# EAGLE board CFT-PB1-revG-TSSOP (EAGLE 7.6.0), part 1 of 2
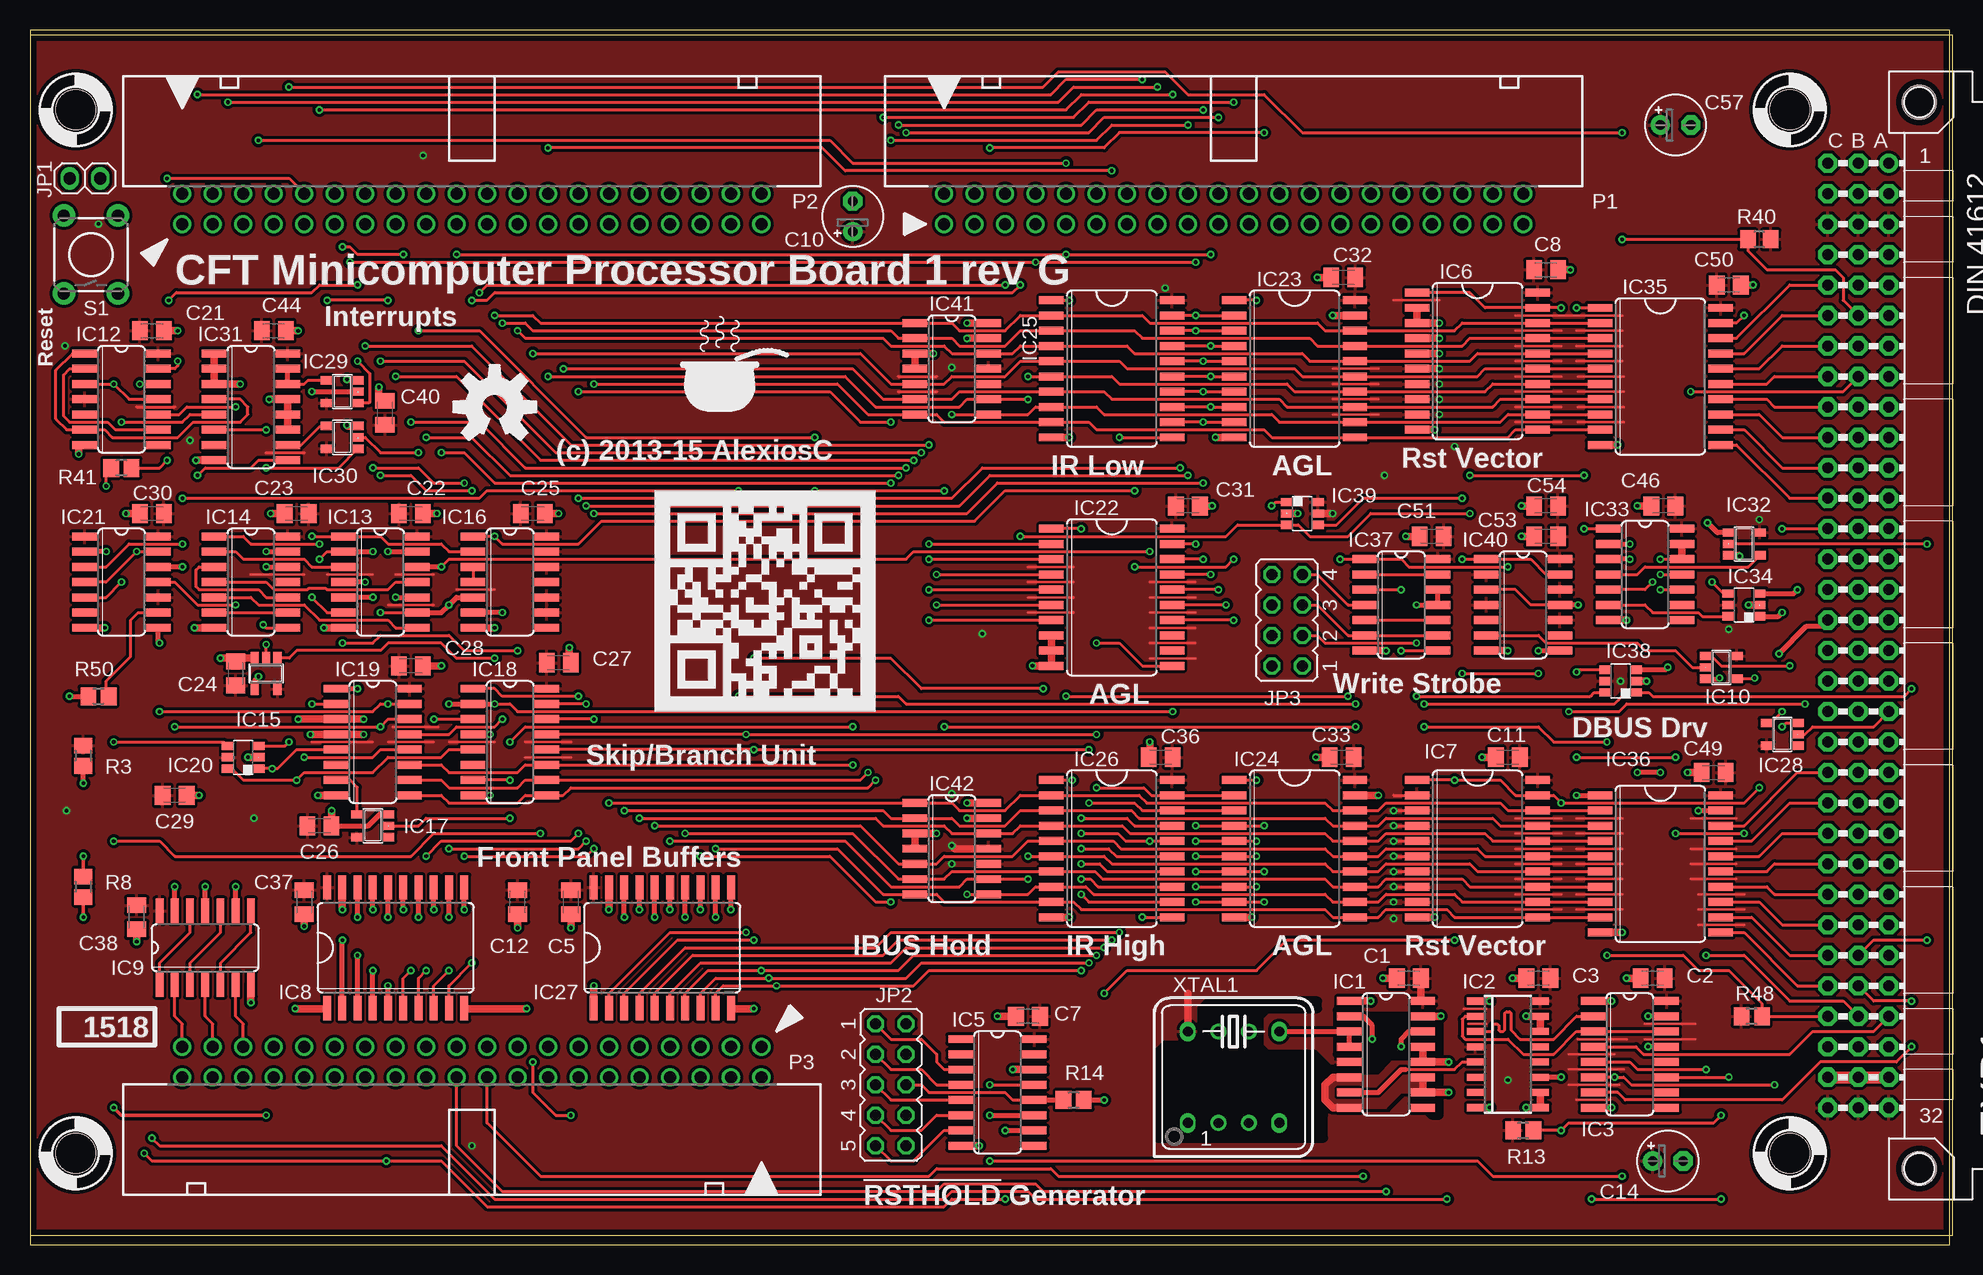
[diagram p0: board, top side]
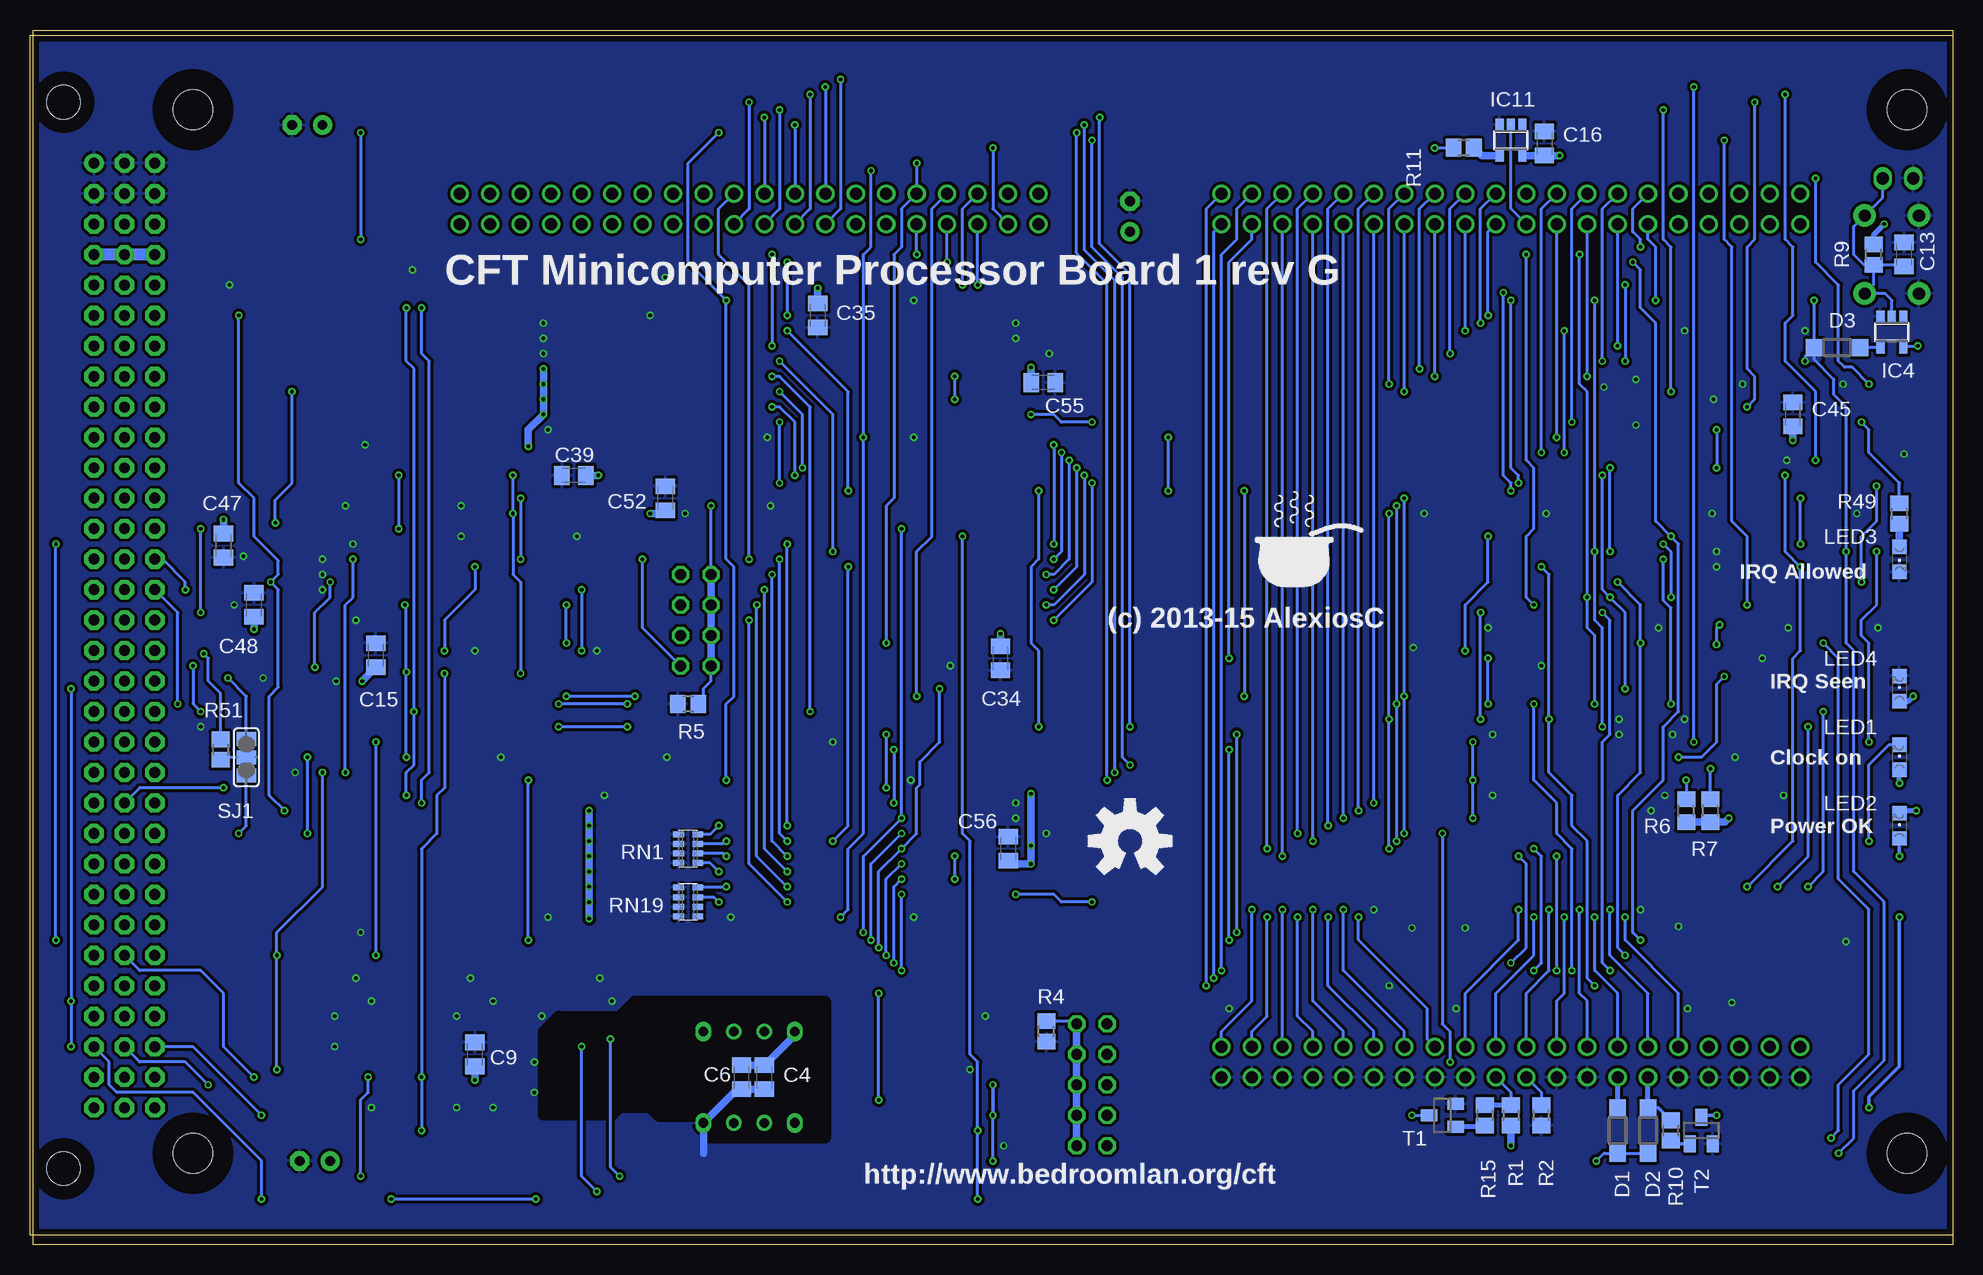
[diagram p1: board, bottom side, seen from below]

Size 160 x 101.27 mm. Coordinates in mm from the lower left corner, seen from the top.
Outline: 0,0 160,0 160,101.27 0,101.27 0,0
Copper layers (1*16): Top 0.035mm / dielectric 1.5mm / Bottom 0.035mm
Design rules "smart-prototyping *": minimum track width 7mil, minimum drill 12mil, track to track 7mil, track to pad 7mil, pad to pad 7mil, via to via 7mil, smd to smd 0mil, copper to edge 20mil, drill to drill 10mil, minimum pad ring 10mil, minimum via ring 6mil, stop-mask expansion 2mil, vias tented up to drill 25mil, thermal gap 10mil
Net classes: 0 default: width 0.254 mm, clearance 0.152 mm; 1 low power: width 0.254 mm, clearance 0.152 mm; 2 Power rails: width 0.61 mm, clearance 0.152 mm
tRestrict: area 94,8.9 to 117.5,20.3
bRestrict: area 94,8.9 to 117.5,20.3

## Footprints (pad centres in the part's own frame; a part is rotated, then mirrored left to right if it is on the bottom)
C0805K = smd 1.3 x 1.6: 1 -1,0; 2 1,0
E2,5-5 = drill 0.813 pad 1.6: + -1.27,0 | drill 0.813 pad 1.6 octagon: - 1.27,0
SOD123 = smd 1.4 x 1.4: A 1.9,0; C -1.9,0
VG96K = drill 0.914 pad 1.6: A1 154.94,39.37 | drill 0.914 pad 1.6 octagon: A2 154.94,36.83; A3 154.94,34.29; A4 154.94,31.75; A5 154.94,29.21; A6 154.94,26.67; A7 154.94,24.13; A8 154.94,21.59; A9 154.94,19.05; A10 154.94,16.51; A11 154.94,13.97; A12 154.94,11.43; A13 154.94,8.89; A14 154.94,6.35; A15 154.94,3.81; A16 154.94,1.27; A17 154.94,-1.27; A18 154.94,-3.81; A19 154.94,-6.35; A20 154.94,-8.89; A21 154.94,-11.43; A22 154.94,-13.97; A23 154.94,-16.51; A24 154.94,-19.05; A25 154.94,-21.59; A26 154.94,-24.13; A27 154.94,-26.67; A28 154.94,-29.21; A29 154.94,-31.75; A30 154.94,-34.29; A31 154.94,-36.83; A32 154.94,-39.37; B1 152.4,39.37; B2 152.4,36.83; B3 152.4,34.29; B4 152.4,31.75; B5 152.4,29.21; B6 152.4,26.67; B7 152.4,24.13; B8 152.4,21.59; B9 152.4,19.05; B10 152.4,16.51; B11 152.4,13.97; B12 152.4,11.43; B13 152.4,8.89; B14 152.4,6.35; B15 152.4,3.81; B16 152.4,1.27; B17 152.4,-1.27; B18 152.4,-3.81; B19 152.4,-6.35; B20 152.4,-8.89; B21 152.4,-11.43; B22 152.4,-13.97; B23 152.4,-16.51; B24 152.4,-19.05; B25 152.4,-21.59; B26 152.4,-24.13; B27 152.4,-26.67; B28 152.4,-29.21; B29 152.4,-31.75; B30 152.4,-34.29; B31 152.4,-36.83; B32 152.4,-39.37; C1 149.86,39.37; C2 149.86,36.83; C3 149.86,34.29; C4 149.86,31.75; C5 149.86,29.21; C6 149.86,26.67; C7 149.86,24.13; C8 149.86,21.59; C9 149.86,19.05; C10 149.86,16.51; C11 149.86,13.97; C12 149.86,11.43; C13 149.86,8.89; C14 149.86,6.35; C15 149.86,3.81; C16 149.86,1.27; C17 149.86,-1.27; C18 149.86,-3.81; C19 149.86,-6.35; C20 149.86,-8.89; C21 149.86,-11.43; C22 149.86,-13.97; C23 149.86,-16.51; C24 149.86,-19.05; C25 149.86,-21.59; C26 149.86,-24.13; C27 149.86,-26.67; C28 149.86,-29.21; C29 149.86,-31.75; C30 149.86,-34.29; C31 149.86,-36.83; C32 149.86,-39.37 | hole 2.794: 157.48,44.45; 157.48,-44.45
SO16 = smd 0.66 x 2.032: 1 -4.445,-3.073; 2 -3.175,-3.073; 3 -1.905,-3.073; 4 -0.635,-3.073; 5 0.635,-3.073; 6 1.905,-3.073; 7 3.175,-3.073; 8 4.445,-3.073; 9 4.445,3.073; 10 3.175,3.073; 11 1.905,3.073; 12 0.635,3.073; 13 -0.635,3.073; 14 -1.905,3.073; 15 -3.175,3.073; 16 -4.445,3.073
SO16D = smd 0.6 x 1.4: 1 -4.445,-2.715; 2 -3.175,-2.715; 3 -1.905,-2.715; 4 -0.635,-2.715; 5 0.635,-2.715; 6 1.905,-2.715; 7 3.175,-2.715; 8 4.445,-2.715; 9 4.445,2.715; 10 3.175,2.715; 11 1.905,2.715; 12 0.635,2.715; 13 -0.635,2.715; 14 -1.905,2.715; 15 -3.175,2.715; 16 -4.445,2.715
SOT23-5 = smd 0.69 x 0.99: 1 -0.95,-1.29; 2 0,-1.29; 3 0.95,-1.29; 4 0.95,1.3; 5 -0.95,1.3
SO20W = smd 0.66 x 2.032: 1 -5.715,-5.029; 2 -4.445,-5.029; 3 -3.175,-5.029; 4 -1.905,-5.029; 5 -0.635,-5.029; 6 0.635,-5.029; 7 1.905,-5.029; 8 3.175,-5.029; 9 4.445,-5.029; 10 5.715,-5.029; 11 5.715,5.029; 12 4.445,5.029; 13 3.175,5.029; 14 1.905,5.029; 15 0.635,5.029; 16 -0.635,5.029; 17 -1.905,5.029; 18 -3.175,5.029; 19 -4.445,5.029; 20 -5.715,5.029
SO14 = smd 0.66 x 2.032: 1 -3.81,-3.073; 2 -2.54,-3.073; 3 -1.27,-3.073; 4 0,-3.073; 5 1.27,-3.073; 6 2.54,-3.073; 7 3.81,-3.073; 8 3.81,3.073; 9 2.54,3.073; 10 1.27,3.073; 11 0,3.073; 12 -1.27,3.073; 13 -2.54,3.073; 14 -3.81,3.073
DBV_R-PDSO-G6 = smd 0.69 x 0.99: 1 -0.95,-1.29; 2 0,-1.29; 3 0.95,-1.29; 4 0.95,1.3; 5 0,1.3; 6 -0.95,1.3
1X02 = drill 1.016 long: 1 -1.27,0; 2 1.27,0
JP5Q = drill 0.914 octagon: 1 -5.08,-1.27; 2 -5.08,1.27; 3 -2.54,-1.27; 4 -2.54,1.27; 5 0,-1.27; 6 0,1.27; 7 2.54,-1.27; 8 2.54,1.27; 9 5.08,-1.27; 10 5.08,1.27
JP4Q = drill 0.914 octagon: 1 -3.81,-1.27; 2 -3.81,1.27; 3 -1.27,-1.27; 4 -1.27,1.27; 5 1.27,-1.27; 6 1.27,1.27; 7 3.81,-1.27; 8 3.81,1.27
CHIPLED_0805 = smd 1.2 x 1.2: A 0,-1.05; C 0,1.05
PAK100/2500-5-40 = drill 1 pad 1.422: 1 -24.13,-1.27; 2 -24.13,1.27; 3 -21.59,-1.27; 4 -21.59,1.27; 5 -19.05,-1.27; 6 -19.05,1.27; 7 -16.51,-1.27; 8 -16.51,1.27; 9 -13.97,-1.27; 10 -13.97,1.27; 11 -11.43,-1.27; 12 -11.43,1.27; 13 -8.89,-1.27; 14 -8.89,1.27; 15 -6.35,-1.27; 16 -6.35,1.27; 17 -3.81,-1.27; 18 -3.81,1.27; 19 -1.27,-1.27; 20 -1.27,1.27; 21 1.27,-1.27; 22 1.27,1.27; 23 3.81,-1.27; 24 3.81,1.27; 25 6.35,-1.27; 26 6.35,1.27; 27 8.89,-1.27; 28 8.89,1.27; 29 11.43,-1.27; 30 11.43,1.27; 31 13.97,-1.27; 32 13.97,1.27; 33 16.51,-1.27; 34 16.51,1.27; 35 19.05,-1.27; 36 19.05,1.27; 37 21.59,-1.27; 38 21.59,1.27; 39 24.13,-1.27; 40 24.13,1.27
R0805 = smd 1.3 x 1.5: 1 -0.85,0; 2 0.85,0
R0805' = smd 1.3 x 1.5: 1 -0.95,0; 2 0.95,0
CTS742C083 = smd 0.5 x 0.9: 1 -1.2,-0.8; 2 -0.4,-0.8; 3 0.4,-0.8; 4 1.2,-0.8; 5 1.2,0.8; 6 0.4,0.8; 7 -0.4,0.8; 8 -1.2,0.8
TACTILE-PTH = drill 1.016 pad 1.88: 1 -3.251,2.261; 2 3.251,2.261; 3 -3.251,-2.261; 4 3.251,-2.261
SJ_2 = smd 1.168 x 1.6: 1 -1.524,0; 2 0,0; 3 1.524,0
SOT23 = smd 1 x 1.4: 1 -0.95,-1.1; 2 0.95,-1.1; 3 0,1.1
STANDOFF_28_60 = hole 3.302: 0,0
DIL08S-SOCKET = drill 0.813 long: 1 -3.81,-3.81; 4 3.81,-3.81; 5 3.81,3.81; 8 -3.81,3.81 | drill 0.8: 2 -1.27,-3.81; 3 1.27,-3.81; 6 1.27,3.81; 7 -1.27,3.81

## Placement (x,y rotation side)
$4_37_$  SIGNATURESILK  [SIGNATURE]  54.61,69.21 0 top
$4_37_$1  SIGNATURESILK  [SIGNATURE]  57.78,54.61 0 bottom
$4_39_$  OSHW-LOGOL  [OSHW-LOGO-L]  38.73,69.85 0 top
$4_39_$1  OSHW-LOGOL  [OSHW-LOGO-L]  68.58,33.66 0 bottom
$4_40_$  QRCODE-CFT  [CFT-QRCODE]  52.07,44.45 0 top
C1  0.1uF  [C0805K]  114.94,22.22 0 top
C2  0.1uF  [C0805K]  135.25,22.22 0 top
C3  0.1uF  [C0805K]  125.73,22.22 0 top
C4  1uF  [C0805K]  100.97,13.97 90 bottom
C5  0.1uF  [C0805K]  45.09,28.57 90 top
C6  0.1uF  [C0805K]  99.06,13.97 90 bottom
C7  0.1uF  [C0805K]  83.19,19.05 0 top
C8  0.1uF  [C0805K]  126.36,81.28 180 top
C9  1uF  [C0805K]  123.19,15.88 270 bottom
C10  1uF  [E2,5-5]  68.58,85.72 90 top
C11  0.1uF  [C0805K]  123.19,40.64 0 top
C12  1uF  [C0805K]  40.64,28.57 90 top
C13  0.1uF  [C0805K]  4.06,82.55 270 bottom
C14  47uF  [E2,5-5]  136.53,6.98 0 top
C15  0.1uF  [C0805K]  131.44,49.15 270 bottom
C16  0.1uF  [C0805K]  34.04,91.82 270 bottom
C21  0.1uF  [C0805K]  10.16,76.2 180 top
C22  0.1uF  [C0805K]  31.75,60.96 180 top
C23  0.1uF  [C0805K]  22.23,60.96 0 top
C24  0.1uF  [C0805K]  17.14,47.62 270 top
C25  0.1uF  [C0805K]  41.91,60.96 180 top
C26  0.1uF  [C0805K]  24.13,34.93 180 top
C27  0.1uF  [C0805K]  44.07,48.51 180 top
C28  0.1uF  [C0805K]  31.75,48.26 180 top
C29  0.1uF  [C0805K]  12.06,37.47 180 top
C30  1uF  [C0805K]  10.16,60.96 0 top
C31  0.1uF  [C0805K]  96.52,61.6 180 top
C32  0.1uF  [C0805K]  109.47,80.64 0 top
C33  0.1uF  [C0805K]  109.35,40.64 0 top
C34  1uF  [C0805K]  79.38,48.9 90 bottom
C35  0.1uF  [C0805K]  94.61,77.47 90 bottom
C36  0.1uF  [C0805K]  94.23,40.64 0 top
C37  0.1uF  [C0805K]  22.86,28.57 90 top
C38  0.1uF  [C0805K]  8.89,27.3 90 top
C39  1uF  [C0805K]  114.94,64.14 0 bottom
C40  0.1uF  [C0805K]  29.59,69.34 270 top
C44  0.1uF  [C0805K]  20.32,76.2 180 top
C45  1uF  [C0805K]  13.34,69.21 270 bottom
C46  0.1uF  [C0805K]  136.14,61.6 0 top
C47  0.1uF  [C0805K]  144.15,58.29 90 bottom
C48  0.1uF  [C0805K]  141.6,53.34 270 bottom
C49  0.1uF  [C0805K]  140.34,39.37 0 top
C50  0.1uF  [C0805K]  141.6,80.01 180 top
C51  0.1uF  [C0805K]  116.84,59.05 0 top
C52  0.1uF  [C0805K]  107.31,62.23 270 bottom
C53  0.1uF  [C0805K]  126.36,59.05 0 top
C54  1uF  [C0805K]  126.36,61.6 0 top
C55  0.1uF  [C0805K]  75.82,71.88 180 bottom
C56  0.1uF  [C0805K]  78.74,33.02 270 bottom
C57  47uF  [E2,5-5]  137.16,93.34 0 top
D1  [SOD123]  27.94,9.53 270 bottom
D2  [SOD123]  25.4,9.53 270 bottom
D3  [SOD123]  9.65,74.8 180 bottom
EXP1  [VG96K]  0,50.8 0 top
IC1  74HC253D  [SO16]  113.03,15.88 270 top
IC2  74HC193D  [SO16D]  123.19,15.88 270 top
IC3  74HC139D  [SO16]  133.35,15.88 270 top
IC4  74AUC1G17DBV  [SOT23-5]  5.08,76.07 180 bottom
IC5  74HC590D  [SO16]  80.64,12.7 270 top
IC6  74HC541DW  [SO20W]  120.65,73.66 270 top
IC7  74HC541DW  [SO20W]  120.65,33.02 270 top
IC8  74HC541DW  [SO20W]  30.48,24.77 0 top
IC9  74AC04D  [SO14]  14.61,24.77 0 top
IC10  74LVC1G125DBV  [SOT23-5]  140.97,48.13 270 top
IC11  74AHC1G04DBV  [SOT23-5]  36.83,92.08 180 bottom
IC12  74HC74D  [SO14]  7.62,70.48 270 top
IC13  74HC08D  [SO14]  29.21,55.25 270 top
IC14  74HC32D  [SO14]  18.41,55.25 270 top
IC15  74AHC1G86DBV  [SOT23-5]  19.68,47.62 180 top
IC16  74HC32D  [SO14]  40.01,55.25 270 top
IC17  74AHC1G04DBV  [SOT23-5]  28.57,34.93 90 top
IC18  74HC251D  [SO16]  40.01,41.91 270 top
IC19  74HC251D  [SO16]  28.57,41.91 270 top
IC20  74AC1G11DBV  [DBV_R-PDSO-G6]  17.78,40.64 90 top
IC21  74HC74D  [SO14]  7.62,55.25 270 top
IC22  74HC574D  [SO20W]  90.17,53.98 270 top
IC23  74HC541DW  [SO20W]  105.41,73.02 270 top
IC24  74HC541DW  [SO20W]  105.41,33.02 270 top
IC25  74HC573D  [SO20W]  90.17,73.02 270 top
IC26  74HC573D  [SO20W]  90.17,33.02 270 top
IC27  74HC541DW  [SO20W]  52.7,24.77 0 top
IC28  74AHC1G04DBV  [SOT23-5]  146.05,42.55 90 top
IC29  74AHC1G08DBV  [SOT23-5]  26.04,71.12 90 top
IC30  74AHC1G32DBV  [SOT23-5]  26.04,67.31 90 top
IC31  74HC112D  [SO16]  18.41,69.85 270 top
IC32  74AHC1G32DBV  [SOT23-5]  142.88,58.42 270 top
IC33  74HC74D  [SO14]  134.62,55.88 270 top
IC34  74AC1G11DBV  [DBV_R-PDSO-G6]  142.88,53.34 90 top
IC35  74HC245DW  [SO20W]  135.89,72.39 270 top
IC36  74HC245DW  [SO20W]  135.89,31.75 270 top
IC37  74AC04D  [SO14]  114.3,53.34 270 top
IC38  74AC1G27DBV  [DBV_R-PDSO-G6]  132.59,46.99 90 top
IC39  74AC1G11DBV  [DBV_R-PDSO-G6]  106.05,60.96 270 top
IC40  74HC74D  [SO14]  124.46,53.34 270 top
IC41  SN74ACT1071D  [SO14]  76.83,73.02 270 top
IC42  SN74ACT1071D  [SO14]  76.83,33.02 270 top
JP1  [1X02]  4.57,88.9 0 top
JP2  [JP5Q]  71.75,13.33 270 top
JP3  [JP4Q]  104.78,52.07 90 top
LED1  LED-5MM-GREEN  [CHIPLED_0805]  4.45,40.64 0 bottom
LED2  LED-5MM-GREEN  [CHIPLED_0805]  4.45,34.93 0 bottom
LED3  LED-5MM-GREEN  [CHIPLED_0805]  4.45,57.15 180 bottom
LED4  LED-5MM-GREEN  [CHIPLED_0805]  4.45,46.36 0 bottom
P1  2540-5  [PAK100/2500-5-40]  100.33,86.36 0 top
P2  2540-5  [PAK100/2500-5-40]  36.83,86.36 0 top
P3  2540-5  [PAK100/2500-5-40]  36.83,15.24 180 top
R1  4k7  [R0805]  36.83,10.79 270 bottom
R2  4k7  [R0805]  34.29,10.79 90 bottom
R3  330R  [R0805]  4.45,40.77 270 top
R4  4k7  [R0805]  75.56,17.78 90 bottom
R5  4k7  [R0805]  105.41,45.09 180 bottom
R6  4k7  [R0805']  22.23,36.2 90 bottom
R7  4k7  [R0805']  20.19,36.2 90 bottom
R8  330R  [R0805]  4.45,29.84 270 top
R9  50k  [R0805]  6.6,82.55 90 bottom
R10  4k7  [R0805]  23.5,9.53 90 bottom
R11  30R  [R0805]  40.77,91.44 180 bottom
R13  4k7  [R0805]  124.46,9.53 180 top
R14  30R  [R0805]  87,12.06 180 top
R15  4k7  [R0805]  38.99,10.79 90 bottom
R40  4k7  [R0805']  144.15,83.82 180 top
R41  30R  [R0805]  7.62,64.77 180 top
R48  4k7  [R0805]  143.51,19.05 180 top
R49  330R  [R0805]  4.45,60.96 90 bottom
R50  330R  [R0805]  5.71,45.72 0 top
R51  30R  [R0805]  144.4,41.28 270 bottom
RN1  4k7  [CTS742C083]  105.41,33.02 270 bottom
RN19  4k7  [CTS742C083]  105.41,28.57 270 bottom
S1  [TACTILE-PTH]  5.08,82.55 90 top
SJ1  [SJ_2]  142.24,40.64 90 bottom
T1  BC848  [SOT23]  42.55,10.79 90 bottom
T2  BC848  [SOT23]  20.95,9.53 0 bottom
U1  HOLE  [STANDOFF_28_60]  3.81,94.61 0 top
U2  HOLE  [STANDOFF_28_60]  3.81,7.62 0 top
U3  HOLE  [STANDOFF_28_60]  146.69,94.61 0 top
U4  HOLE  [STANDOFF_28_60]  146.69,7.62 0 top
XTAL1  16.000MHz  [DIL08S-SOCKET]  100.33,13.97 0 top

## Library data of the parts
$4_37_$ $4_37_$1 $4_40_$ D1-D3 IC1-IC9 IC11-IC42 LED1-LED4 U1-U4 XTAL1 = alexios
$4_39_$ $4_39_$1 S1 = SparkFun
C1-C16 C21-C40 C44-C57 R6 R7 R40 = rcl
EXP1 = alexios-19inch
IC10 = 74xx-little-us
JP1 = pinhead
JP2 JP3 SJ1 = jumper
P1-P3 = con-3m; OC_FARNELL: 9838414; OC_NEWARK: unknown
R1-R5 R8-R11 R13-R15 R41 R48-R51 = resistor
RN1 RN19 = resistor-net; OC_FARNELL: unknown; OC_NEWARK: unknown
T1 T2 = transistor

## Nets
![R1]: EXP1.B9
![R6]: EXP1.B10
![R7]: EXP1.B11
![W1]: EXP1.B12
!ACCPL: P1.39
!AINDEX: P2.20
!BUSEN: IC34.4 IC35.19 IC36.19
!CLI: IC29.2 P1.17
!CLL: P1.1
!CPL: P1.2
!DEC: P1.40
!END: IC21.11 IC22.11 P1.10
!ENDEXT: EXP1.B7
!FINT: IC30.1 IC31.6
!FPRESET: D1.C P3.28
!HALT: EXP1.A19 IC28.2
!INCPC: P2.3
!IO: EXP1.C14 IC34.3
!IODEV1XX: EXP1.B24
!IODEV2XX: EXP1.B25
!IODEV3XX: EXP1.B26
!IRQ: EXP1.C29 IC30.2 R48.1
!IRQ0: EXP1.C18
!IRQ1: EXP1.C19
!IRQ2: EXP1.C20
!IRQ3: EXP1.A13
!IRQ4: EXP1.A14
!IRQ5: EXP1.A15
!IRQ6: EXP1.A16
!IRQ7: EXP1.A18
!IRQS: EXP1.A30 IC21.8
!MASKEDIRQ: IC30.4 IC31.10
!MEM: EXP1.C13 IC34.1
!OPIF3: IC17.4 IC19.7
!R: EXP1.C15 IC35.1 IC36.1
!RAC: P2.4
!RAGL: IC23.1 IC24.1 P1.3
!RDR: P2.5
!RESET: D1.A D2.A D3.A EXP1.C30 IC2.11 IC5.10 IC12.13 IC21.4 IC21.13 IC29.1 IC33.1 IC39.3 R13.1
!RESET_OR_CLI: IC29.4 IC31.14 IC31.15
!RPC: P2.6
!RSTHOLD: EXP1.B22 IC6.1 IC6.19 IC7.1 IC7.19 R14.1
!RSTHOLD-SHORT: IC5.12 JP2.2 JP2.4 JP2.6 JP2.8 JP2.10 R4.2 R14.2
!SKIP: P1.15 R41.1
!SKIP0: IC20.4 IC21.2
!SKIPEXT: EXP1.B6 IC20.3 R40.2
!STI: IC12.10 P1.16
!STI-DELAY: IC12.1 IC12.6 IC31.4
!STPAC: P2.1
!STPDR: P2.2
!SYSDEV: EXP1.A28
!T34: EXP1.B27 IC3.11 IC32.2
!W: EXP1.C16 R51.1
!WAC: P2.7
!WAITING: IC33.6 IC34.6
!WALU: P1.4
!WAR: P2.8
!WCLR: IC37.1 IC40.8 JP3.1
!WDR: P2.9
!WEN: IC38.6 P1.8
!WIR: IC11.2 P2.19
!WPC: IC12.3 IC12.11 P2.10
!WS: EXP1.B8 IC32.1
*TPA: EXP1.A17
*TPC: EXP1.C17
+3.3V: EXP1.A4 EXP1.B4 EXP1.C4
+12V [Power rails]: EXP1.A31 EXP1.B31 EXP1.C31
AB0: EXP1.A5
AB1: EXP1.A6
AB2: EXP1.A7
AB3: EXP1.A8
AB4: EXP1.A9
AB5: EXP1.A10
AB6: EXP1.A11
AB7: EXP1.A12
AB8: EXP1.A20
AB9: EXP1.A21
AB10: EXP1.A22
AB11: EXP1.A23
AB12: EXP1.A24
AB13: EXP1.A25
AB14: EXP1.A26
AB15: EXP1.A27
AC0: P1.23
AC1: P1.24
AC2: P1.25
AC3: P1.26
AC4: P1.27
AC5: P1.28
AC6: P1.29
AC7: P1.30
AC8: P1.31
AC9: P1.32
AC10: P1.33
AC11: P1.34
AC12: P1.35
AC13: P1.36
AC14: P1.37
AC15: P1.38
AEXT0: EXP1.B13
AEXT1: EXP1.B14
AEXT2: EXP1.B15
AEXT3: EXP1.B16
AEXT4: EXP1.B17
AEXT5: EXP1.B18
AEXT6: EXP1.B19
AEXT7: EXP1.B20
BFIRQ: IC9.6 P3.35
BFNEG: IC9.4 P3.37
BFZERO: IC9.2 P3.39
CLK1: EXP1.A29 IC3.4
CLK2: EXP1.B29 IC3.5 IC33.3
CLK3: EXP1.B30 IC3.6 IC5.11 IC5.13
CLK4: EXP1.B28 IC3.7 IC21.3 IC38.1
CLKIN: IC1.7 IC2.5
DB0: EXP1.C5 IC35.18
DB1: EXP1.C6 IC35.17
DB2: EXP1.C7 IC35.16
DB3: EXP1.C8 IC35.15
DB4: EXP1.C9 IC35.14
DB5: EXP1.C10 IC35.13
DB6: EXP1.C11 IC35.12
DB7: EXP1.C12 IC35.11
DB8: EXP1.C21 IC36.18
DB9: EXP1.C22 IC36.17
DB10: EXP1.C23 IC36.16
DB11: EXP1.C24 IC36.15
DB12: EXP1.C25 IC36.14
DB13: EXP1.C26 IC36.13
DB14: EXP1.C27 IC36.12
DB15: EXP1.C28 IC36.11
FASTCLK: IC1.3 IC1.4 XTAL1.5
FINT: IC31.5 R49.2
FIRQ: IC9.9 IC21.12 IC31.9
FL: IC13.5 IC19.1 P1.5
FNEG: IC9.11 IC13.13 IC19.14 P2.11
FPCLKEN: IC1.2 P3.20 R1.1 R15.2
FPIR0: IC8.18 P3.31
FPIR1: IC8.17 P3.29
FPIR2: IC8.16 P3.27
FPIR3: IC8.15 P3.25
FPIR4: IC8.14 P3.23
FPIR5: IC8.13 P3.21
FPIR6: IC8.12 P3.19
FPIR7: IC8.11 P3.17
FPIR8: IC27.18 P3.15
FPIR9: IC27.17 P3.13
FPIR10: IC27.16 P3.11
FPIR11: IC27.15 P3.9
FPIR12: IC27.14 P3.7
FPIR13: IC27.13 P3.5
FPIR14: IC27.12 P3.3
FPIR15: IC27.11 P3.1
FPUSTEP: IC1.14 P3.22 R2.2
FV: IC13.2 IC19.2 P1.6
FZERO: IC9.13 IC13.10 IC19.15 P2.12
GND [Power rails]: C1.1 C2.1 C3.1 C4.1 C5.1 C6.1 C7.1 C8.1 C9.1 C10.- C11.1 C12.1 C13.1 C14.- C15.1 C16.1 C21.1 C22.1 C23.1 C24.1 C25.1 C26.1 C27.1 C28.1 C29.1 C30.1 C31.1 C32.1 C33.1 C34.1 C35.1 C36.1 C37.1 C38.1 C39.1 C40.1 C44.1 C45.1 C46.1 C47.1 C48.1 C49.1 C50.1 C51.1 C52.1 C53.1 C54.1 C55.1 C56.1 C57.- EXP1.A1 EXP1.A2 EXP1.B1 EXP1.B2 EXP1.C1 EXP1.C2 IC1.1 IC1.6 IC1.8 IC1.10 IC1.11 IC1.12 IC1.13 IC1.15 IC2.1 IC2.8 IC2.9 IC2.10 IC2.14 IC2.15 IC3.1 IC3.8 IC3.13 IC3.15 IC4.3 IC5.8 IC5.14 IC6.2 IC6.3 IC6.4 IC6.5 IC6.10 IC7.10 IC8.1 IC8.10 IC8.19 IC9.7 IC10.3 IC11.3 IC12.7 IC12.12 IC13.7 IC14.7 IC14.12 IC14.13 IC15.3 IC16.7 IC17.3 IC18.4 IC18.8 IC19.3 IC19.4 IC19.8 IC20.2 IC21.7 IC22.8 IC22.9 IC22.10 IC23.10 IC23.19 IC24.10 IC24.19 IC25.1 IC25.10 IC26.1 IC26.10 IC27.1 IC27.10 IC27.19 IC28.3 IC29.3 IC30.3 IC31.1 IC31.2 IC31.3 IC31.8 IC31.11 IC31.12 IC31.13 IC32.3 IC33.2 IC33.7 IC33.10 IC33.11 IC33.12 IC33.13 IC34.2 IC35.10 IC36.10 IC37.7 IC38.2 IC39.2 IC40.7 IC41.3 IC41.4 IC41.13 IC41.14 IC42.3 IC42.4 IC42.13 IC42.14 JP1.1 LED3.C LED4.C P3.2 P3.4 P3.6 P3.8 P3.10 P3.12 P3.14 P3.16 P3.18 P3.24 P3.26 P3.32 P3.34 P3.36 P3.38 P3.40 R2.1 R4.1 R5.2 RN1.1 RN1.2 RN1.3 RN1.4 RN19.1 RN19.2 RN19.3 RN19.4 S1.1 S1.2 T1.2 T2.2 XTAL1.4
HALT: IC10.1 IC28.4
IBUS0: IC6.18 IC23.18 IC25.2 IC35.2 IC41.1 P2.21
IBUS1: IC6.17 IC23.17 IC25.3 IC35.3 IC41.2 P2.22
IBUS2: IC6.16 IC23.16 IC25.4 IC35.4 IC41.12 P2.23
IBUS3: IC6.15 IC23.15 IC25.5 IC35.5 IC41.5 P2.24
IBUS4: IC6.14 IC23.14 IC25.6 IC35.6 IC41.9 P2.25
IBUS5: IC6.13 IC23.13 IC25.7 IC35.7 IC41.6 P2.26
IBUS6: IC6.12 IC23.12 IC25.8 IC35.8 IC41.8 P2.27
IBUS7: IC6.11 IC23.11 IC25.9 IC35.9 IC41.7 P2.28
IBUS8: IC7.18 IC24.18 IC26.2 IC36.2 IC42.1 P2.29
IBUS9: IC7.17 IC24.17 IC26.3 IC36.3 IC42.2 P2.30
IBUS10: IC7.16 IC24.16 IC26.4 IC36.4 IC42.12 P2.31
IBUS11: IC7.15 IC24.15 IC26.5 IC36.5 IC42.5 P2.32
IBUS12: IC7.14 IC24.14 IC26.6 IC36.6 IC42.9 P2.33
IBUS13: IC7.13 IC24.13 IC26.7 IC36.7 IC42.6 P2.34
IBUS14: IC7.12 IC24.12 IC26.8 IC36.8 IC42.8 P2.35
IBUS15: IC7.11 IC24.11 IC26.9 IC36.9 IC42.7 P2.36
IR0: IC8.2 IC13.1 IC16.2 IC23.2 IC25.19 P1.7
IR1: IC8.3 IC13.4 IC16.1 IC23.3 IC25.18
IR2: IC8.4 IC13.9 IC16.5 IC23.4 IC25.17 P1.9
IR3: IC8.5 IC13.12 IC18.3 IC23.5 IC25.16
IR4: IC8.6 IC15.1 IC18.2 IC23.6 IC25.15
IR5: IC8.7 IC18.1 IC23.7 IC25.14
IR6: IC8.8 IC18.15 IC23.8 IC25.13
IR7: IC8.9 IC18.14 IC23.9 IC25.12
IR8: IC18.13 IC24.2 IC26.19 IC27.2
IR9: IC18.12 IC24.3 IC26.18 IC27.3
IR10: IC22.1 IC26.17 IC27.4
IR11: IC26.16 IC27.5 P1.22
IR12: IC26.15 IC27.6 P2.37
IR13: IC26.14 IC27.7 P2.38
IR14: IC26.13 IC27.8 P2.39
IR15: IC26.12 IC27.9 P2.40
LATCH-IR: IC25.11 IC26.11 R11.2
N$1: IC38.4 IC40.3 IC40.11 SJ1.1
N$2: D3.C IC4.4
N$3: IC9.1 IC9.12
N$4: IC9.3 IC9.10
N$6: IC9.5 IC9.8
N$7: R51.2 SJ1.2
N$8: R15.1 T1.1
N$9: LED1.C T1.3
N$10: LED1.A R3.2
N$13: IC11.4 R11.1
N$14: IC10.2 IC40.6
N$15: IC37.11 IC37.12 JP3.3
N$16: IC37.2 IC37.13
N$17: IC37.5 IC37.10
N$18: IC37.6 IC37.9 JP3.5
N$19: IC32.4 IC33.4
N$20: IC37.3 IC37.8
N$21: IC37.4 JP3.7
N$22: IC10.4 SJ1.3
N$23: IC16.3 IC16.4
N$24: IC39.1 JP3.2 JP3.4 JP3.6 JP3.8 R5.1
N$25: IC39.4 IC40.1 IC40.13
N$26: R10.1 T2.1
N$27: R8.2 T2.3
N$28: IC12.2 IC12.9
N$33: C13.2 IC4.2 JP1.2 R9.1 S1.3 S1.4
N$35: IC21.5 R41.2
N$36: IC5.7 JP2.9
N$154: IC5.6 JP2.7
N$375: IC5.5 JP2.5
N$376: IC5.4 JP2.3
N$377: IC5.3 JP2.1
N$732: LED4.A R50.1
N$733: LED3.A R49.1
N$739: IC21.9 R50.2
OP1_ROLL: IC16.6 IC19.13
OP2_BRANCH: IC15.4 IC19.12
OPIF0: IC18.11 IC19.11 P1.18
OPIF1: IC18.10 IC19.10 P1.19
OPIF2: IC18.9 IC19.9 P1.20
OPIF3: IC17.2 IC18.7 P1.21
PAGE0: IC22.19 IC24.4 RN1.8
PAGE1: IC22.18 IC24.5 RN1.7
PAGE2: IC22.17 IC24.6 RN1.6
PAGE3: IC22.16 IC24.7 RN1.5
PAGE4: IC22.15 IC24.8 RN19.8
PAGE5: IC22.14 IC24.9 RN19.7
PC10: IC22.2 P2.13
PC11: IC22.3 P2.14
PC12: IC22.4 P2.15
PC13: IC22.5 P2.16
PC14: IC22.6 P2.17
PC15: IC22.7 P2.18
POWERLED: LED2.A R8.1
POWEROK: D2.C P3.30 R10.2
RUNIT0: P1.11
RUNIT1: P1.12
RUNIT2: P1.13
RUNIT3: P1.14
SKIPMUXHI: IC19.5 IC20.1 R7.2
SKIPMUXLO: IC18.5 IC20.6 R6.2
SL: IC13.6 IC14.1
SN: IC13.11 IC14.4
SV: IC13.3 IC14.2
SVL: IC14.3 IC14.10
SVLZN: IC14.8 IC15.2
SZ: IC13.8 IC14.5
SZN: IC14.6 IC14.9
VCC [Power rails]: C1.2 C2.2 C3.2 C4.2 C5.2 C6.2 C7.2 C8.2 C9.2 C10.+ C11.2 C12.2 C14.+ C15.2 C16.2 C21.2 C22.2 C23.2 C24.2 C25.2 C26.2 C27.2 C28.2 C29.2 C30.2 C31.2 C32.2 C33.2 C34.2 C35.2 C36.2 C37.2 C38.2 C39.2 C40.2 C44.2 C45.2 C46.2 C47.2 C48.2 C49.2 C50.2 C51.2 C52.2 C53.2 C54.2 C55.2 C56.2 C57.+ EXP1.A3 EXP1.A32 EXP1.B3 EXP1.B32 EXP1.C3 EXP1.C32 IC1.5 IC1.16 IC2.4 IC2.16 IC3.16 IC4.5 IC5.16 IC6.6 IC6.7 IC6.8 IC6.9 IC6.20 IC7.2 IC7.3 IC7.4 IC7.5 IC7.6 IC7.7 IC7.8 IC7.9 IC7.20 IC8.20 IC9.14 IC10.5 IC11.5 IC12.4 IC12.14 IC13.14 IC14.14 IC15.5 IC16.9 IC16.10 IC16.12 IC16.13 IC16.14 IC17.5 IC18.16 IC19.16 IC20.5 IC21.1 IC21.10 IC21.14 IC22.20 IC23.20 IC24.20 IC25.20 IC26.20 IC27.20 IC28.5 IC29.5 IC30.5 IC31.16 IC32.5 IC33.14 IC34.5 IC35.20 IC36.20 IC37.14 IC38.5 IC39.5 IC39.6 IC40.2 IC40.4 IC40.10 IC40.12 IC40.14 IC41.10 IC41.11 IC42.10 IC42.11 LED2.C R1.2 R3.1 R6.1 R7.1 R9.2 R13.2 R40.1 R48.2 XTAL1.8
WAITING: IC33.5 IC38.3
÷2: IC2.3 IC3.2
÷4: IC2.2 IC3.3 IC3.14